# Altium PCB ESP32_breakout.PcbDoc
Units mil, origin at the board's own origin, x right, y up, seen from the top; angles counter-clockwise.
Board outline 2500 x 1250 mil, 4 copper layers (Top Layer, Layer 2, GND, Bottom Layer), stack 23.756 mil thick; 31 components, 42 nets, 192 pads, 125 vias.
Unrouted connection lines stored in the file: 8.
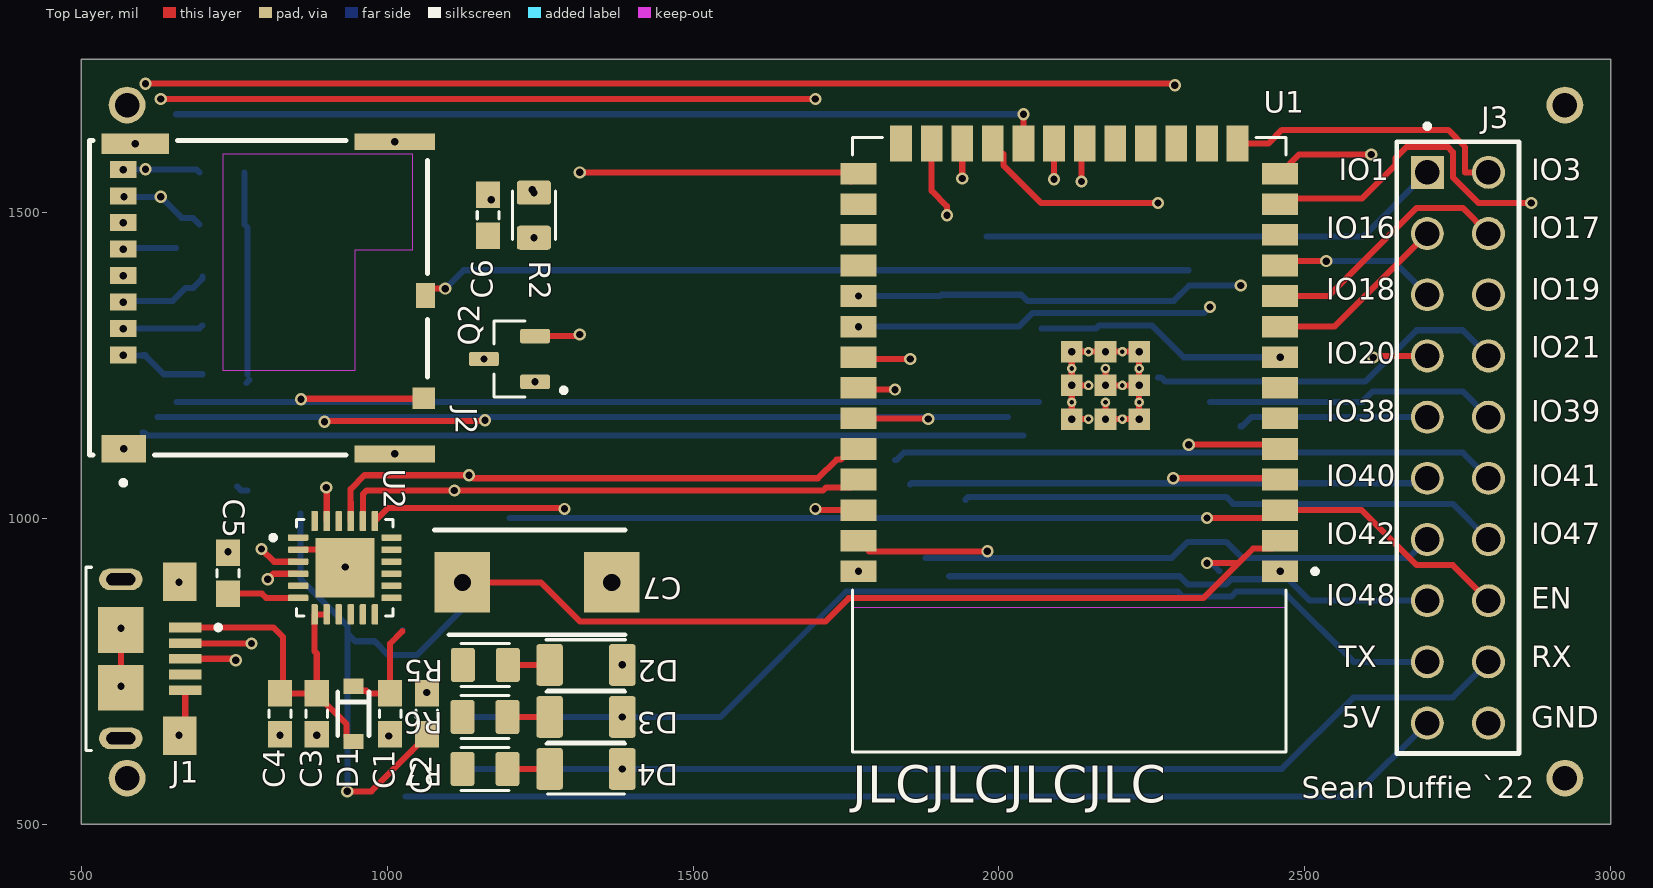
[diagram p0: Top Layer view]
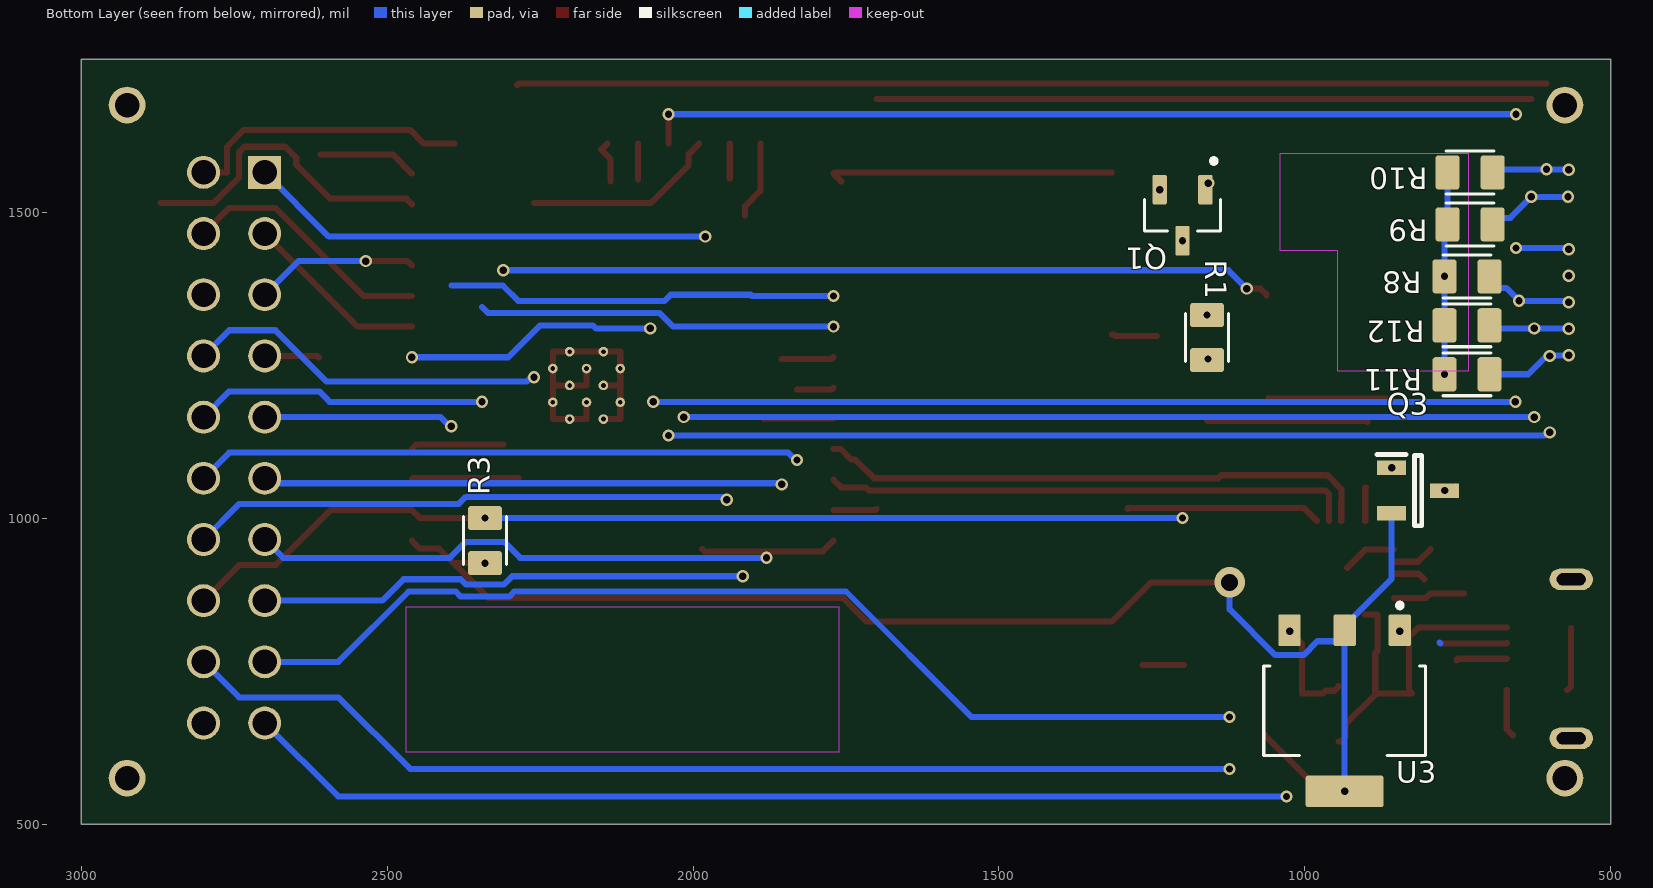
[diagram p1: Bottom Layer view, seen from below]
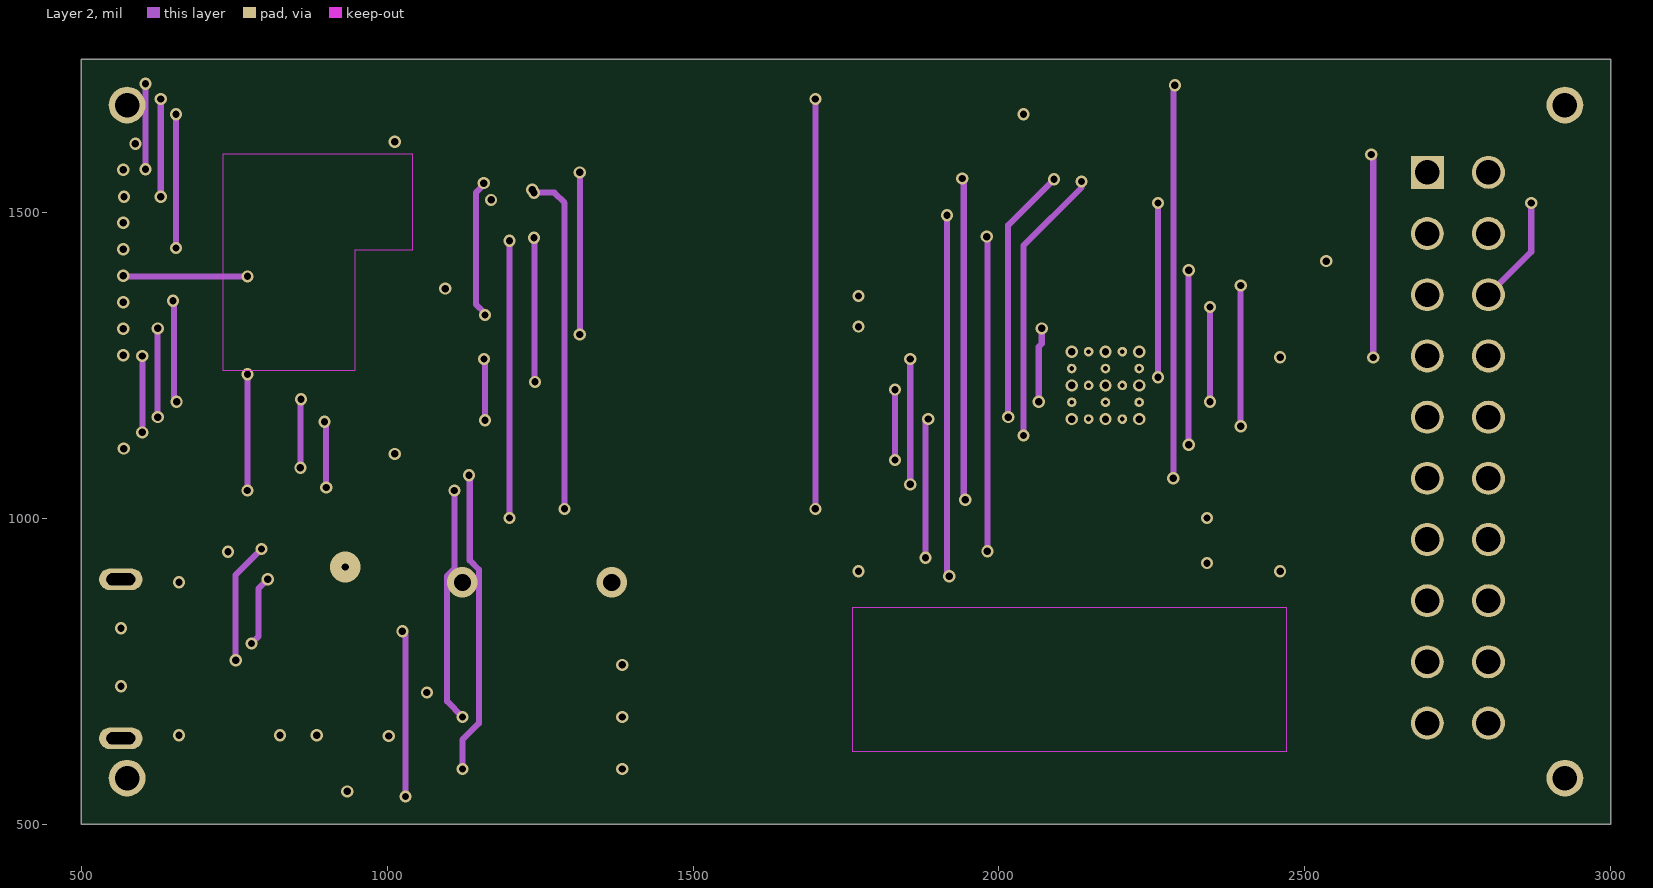
[diagram p2: Layer 2]
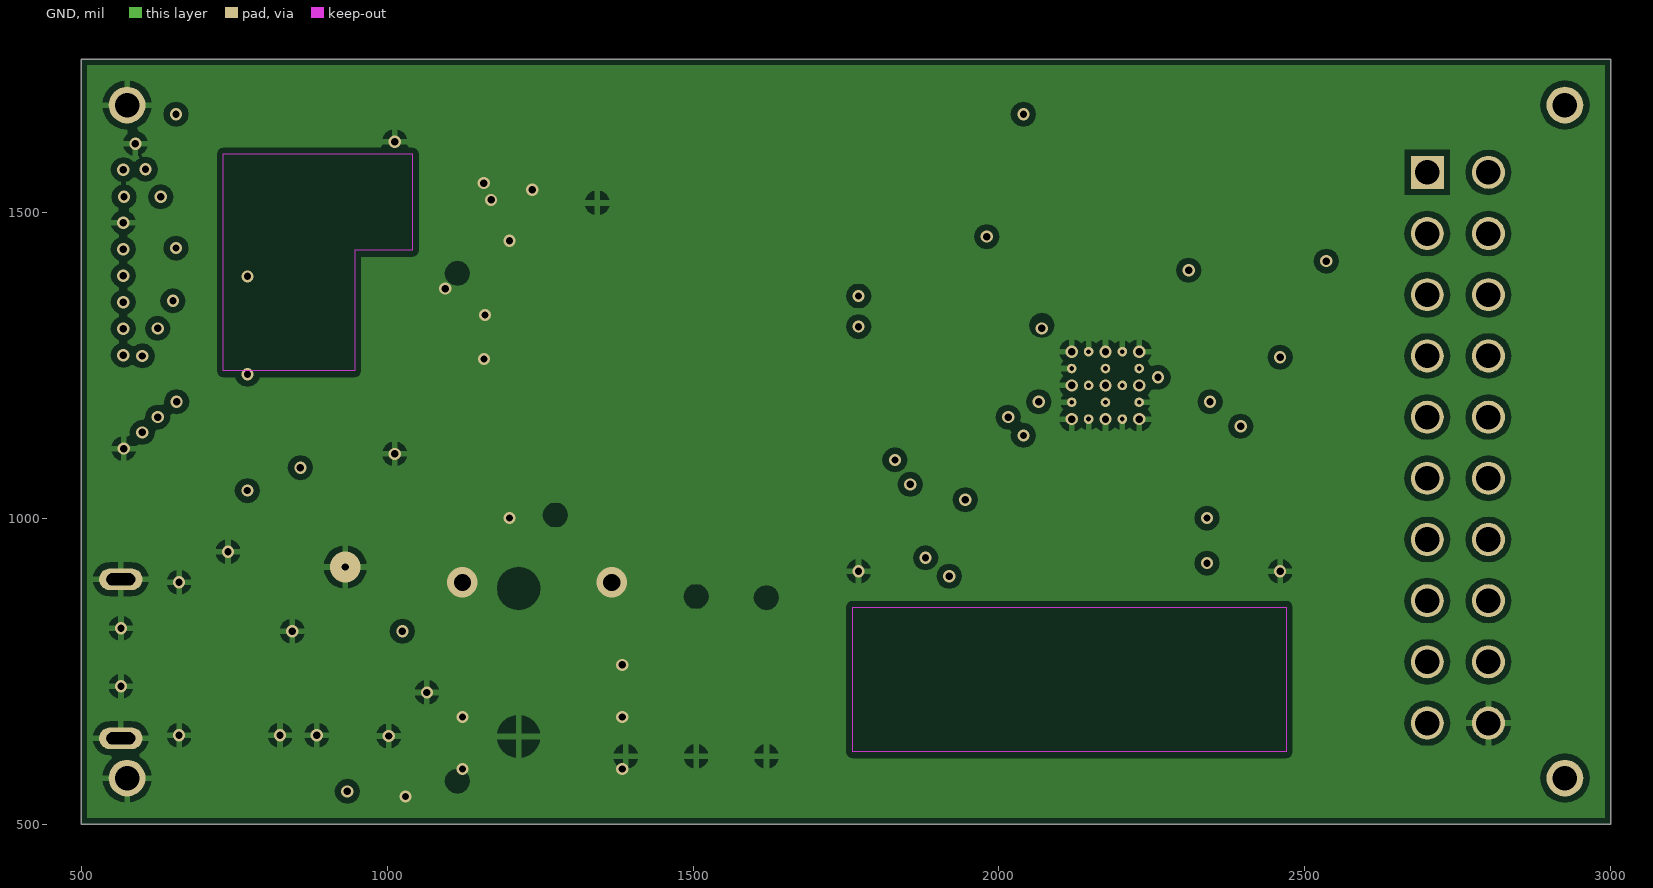
[diagram p3: GND]
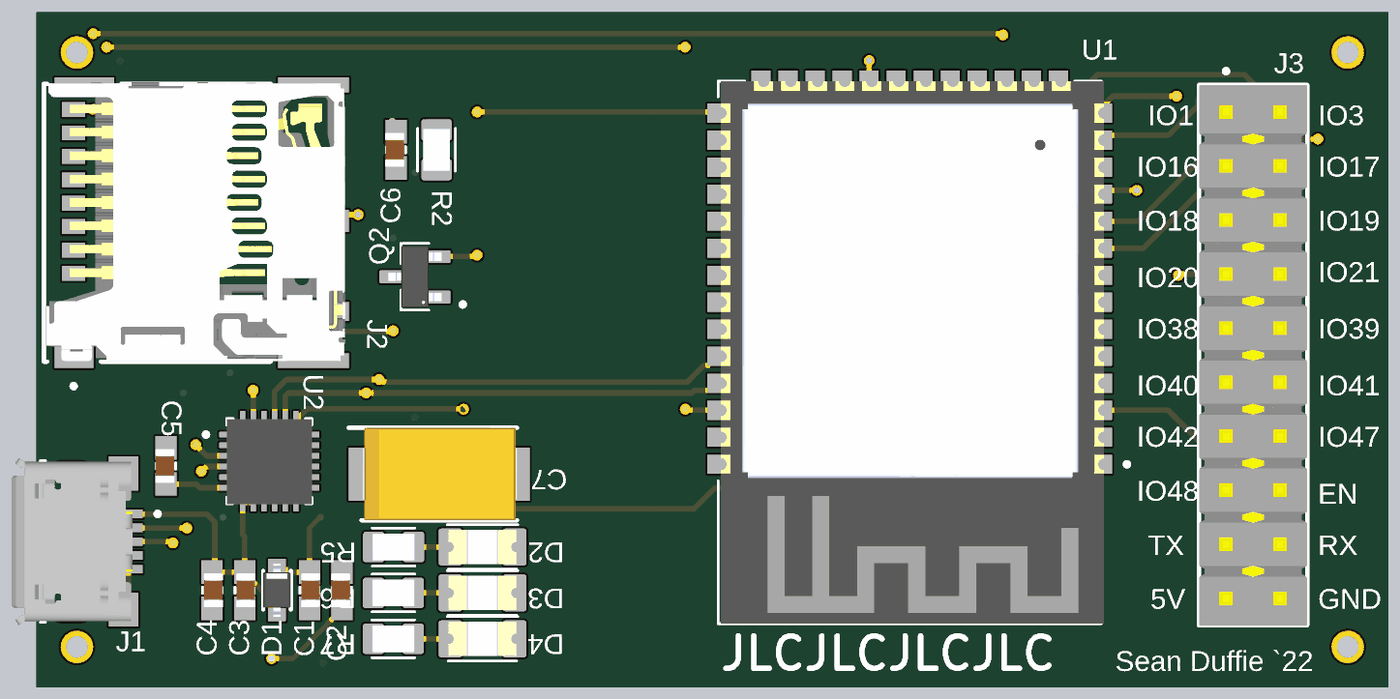
[diagram p4: 3D render of the assembled board from above, using the file's embedded part models]
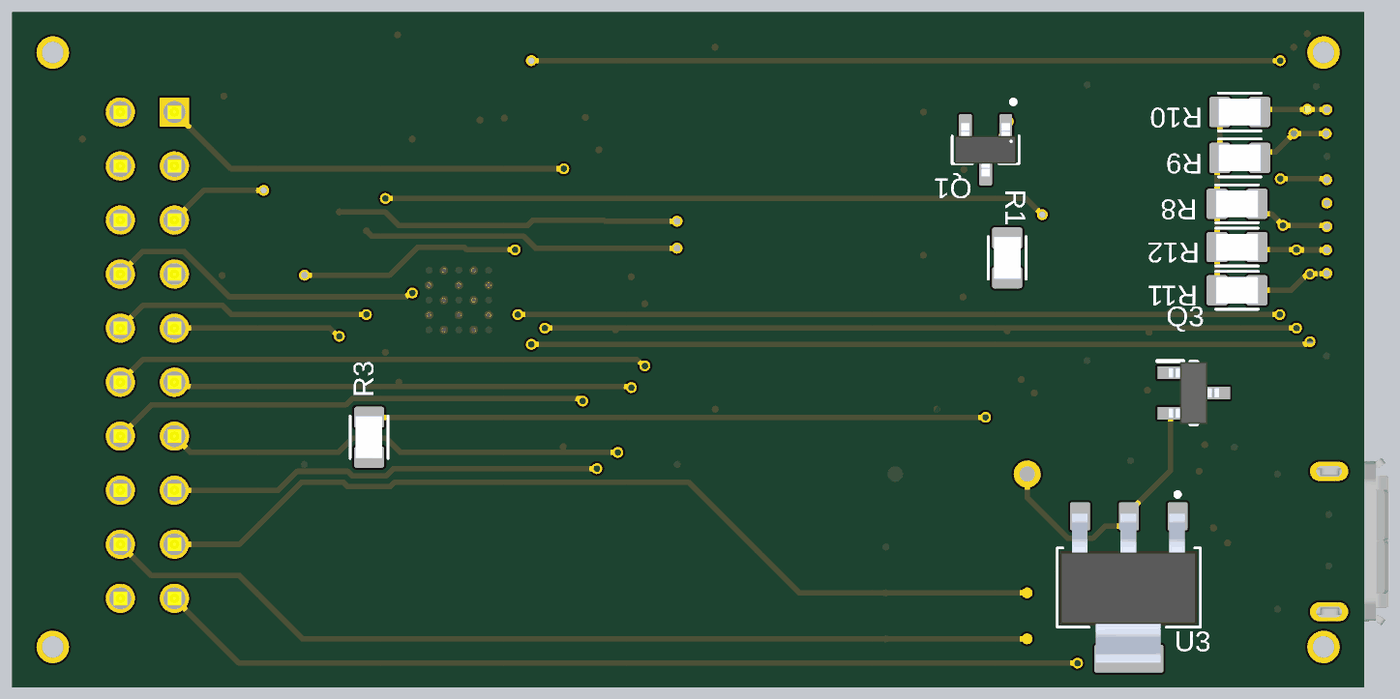
[diagram p5: 3D render of the assembled board from below, using the file's embedded part models]

## Layer stack, top to bottom
Top Solder: solder mask 0.4, Solder Resist, Dk 3.5
Top Layer: signal copper 1.4
Dielectric 2: prepreg 2.8, PP-006, Dk 4.1
Layer 2: signal copper 1.378
Dielectric 1: dielectric 12.6, FR-4, Dk 4.8
GND: signal copper 1.378
Dielectric 3: prepreg 2.8, PP-006, Dk 4.1
Bottom Layer: signal copper 1.4
Bottom Solder: solder mask 0.4, Solder Resist, Dk 3.5

## Board outline
500,500 500,1750 3000,1750 3000,500

## Design rules (kind name [scope] priority, off if disabled: settings)
Clearance [All] p1: gap=10 ignorepadtopadclearanceinfootprint=FALSE except(0: Arc-Hole Track-Hole SMDPad-Hole THPad-Hole Via-Hole Fill-Hole Poly-Hole Region-Hole Text-Hole)
PolygonConnect [All] p1: connectstyle=Relief reliefconductorwidth=10 reliefentries=4 polygonreliefangle="90 Angle" airgapwidth=10
RoutingVias [All] p1: holewidth=12 width=20 viastyle="Through Hole" minholewidth=12 minwidth=16 maxholewidth=28 maxwidth=50
SolderMaskExpansion [All] p1: expansion=4 istentingtop=FALSE
Width [All] p1: maxlimit=10 minlimit=10 preferedwidth=10
30 further rules are at their usual default settings.

## Components (designator, comment, footprint, x,y, rotation, side; value= is the part's Value field where it differs from the comment)
C1 "10 uF" CAPC1608X90 1005,680 r270 top
C2 "10 uF" CAPC1608X90 1065,680 r90 top
C3 "10 uF" CAPC1608X90 885,680 r270 top
C4 "100 nF" CAPC1608X90 825,680 r270 top
C5 "100 nF" CAPC1608X90 740,910 r90 top
C6 "1 uF" CAPC1608X90 1165,1495 r90 top
C7 "TAJD226K025RNJ" CAPPM7344X310N 1245,895 r0 top
D1 "" SOD-323 945,680 r270 top
D2 "RED" LEDC3216X110 1325,760 r180 top
D3 "RED" LEDC3216X110 1325,675 r180 top
D4 "RED" LEDC3216X110 1325,590 r180 top
J1 "micro-usb" AMPHENOL_10118193-0001LF 564.68,770 r270 top
J2 "MEM2080-00-128-00-A_REVA" GCT_MEM2080-00-128-00-A_REVA 790,1360 r90 top
J3 "TSW-110-26-S-D" SAMTEC_TSW-110-26-S-D 2700,1565 r270 top
Q1 "SS8050-G" SOT95P240X111-3N 1200,1495 r270 bottom
Q2 "SS8050-G" SOT95P240X111-3N 1200,1260 r180 top
Q3 "FDN340P" SOT95P237X112-3N 815,1045 r180 bottom
R1 "10k Ohm" RESC2012X65N 1160,1295 r90 bottom
R2 "10k Ohm" RESC2012X65N 1240,1495 r270 top
R3 "10k Ohm" RESC2012X65N 2340,963.19 r90 bottom
R5 "1k Ohms" RESC2012X65N 1160.55,760 r180 top
R6 "1k Ohms" RESC2012X65N 1160,675 r180 top
R7 "1k Ohms" RESC2012X65N 1160,590 r180 top
R8 "47k Ohm" RESC2012X65N 735,1395 r180 bottom
R9 "47k Ohm" RESC2012X65N 730,1480 r180 bottom
R10 "47k Ohm" RESC2012X65N 730,1565 r180 bottom
R11 "47k Ohm" RESC2012X65N 735,1235 r180 bottom
R12 "47k Ohm" RESC2012X65N 735,1315 r180 bottom
U1 "ESP32-S3-WROOM-1-N16R2" XCVR_ESP32-S3-WROOM-1-N16R2 2115,1120 r180 top
U2 "CP2102" QFN50P400X400X80-25N 930.79,918.82 r0 top
U3 "AMS1117-3V3" SOT229P700X180-4N 935,685 r0 bottom

## Footprints (in the part's own frame and the unit in brackets; to place one, negate y for a bottom-side part, rotate by r counter-clockwise, add the part's x,y. Pads: shape width x height; smd on the part's side, far side on the other; paste and mask are expansions set on the pad)
AMPHENOL_10118193-0001LF [mm]
  rect 0.4x1.35 smd: 1(-1.3,2.675) 2(-0.65,2.675) 3(0,2.675) 4(0.65,2.675) 5(1.3,2.675)
  rect 1.6x1.4 smd: S1(-3.2,2.45) S2(3.2,2.45)
  rect 1.9x1.9 smd: S3(1.2,0) S4(-1.2,0)
  oval 0.9x1.8 hole 0.5 slot 1.2 at 90 deg: S5(-3.3,0) S6(3.3,0)
  silkscreen extent -3.8,-1.45 3.8,4.15, body extent -3.93,-2.79 3.93,2.87, height 3.18
CAPC1608X90 [mm]
  rect 1.1x1 smd: 1(-0.85,0) 2(0.85,0)
  silkscreen extent -0.15,-0.45 0.15,0.45, body extent -0.8,-0.39 0.8,0.51, height 0.81
CAPPM7344X310N [mm]
  rect 2.3x2.5 smd: 1(-3.1,0) 2(3.1,0)
  silkscreen extent -4.25,-2.17 3.65,2.17, body extent -3.62,-2.17 3.68,2.17, height 3.1
GCT_MEM2080-00-128-00-A_REVA [mm]
  rect 0.9x0.93 smd: DSW1(-4.17,-6.85)
  rect 1.05x0.78 smd: DSW2(0.095,-6.925)
  rect 0.7x1.1 smd: P1(-2.38,5.615) P2(-1.28,5.615) P3(-0.18,5.615) P4(0.92,5.615) P5(2.02,5.615) P6(3.12,5.615) P7(4.22,5.615) P8(5.32,5.615)
  rect 1.14x1.83 smd: S1(-6.26,5.6)
  rect 0.86x2.8 smd: S2(6.4,5.115)
  rect 0.7x3.33 smd: S3(-6.48,-5.65) S4(6.48,-5.65)
  Keep-Out Layer region: 5.97,-6.385 1.97,-6.385 1.97,-3.985 -3.03,-3.985 -3.03,1.465 5.97,1.465
  silkscreen extent -7.78,-7.02 6.53,7.02, body extent -6.5,-7.15 6.6,6.9, height 1.28
LEDC3216X110 [mm]
  rrect20% 1.1x1.73 smd: A(1.51,0) C(-1.51,0)
  silkscreen extent -1.65,-1.05 1.65,1.05, body extent -1.6,-0.8 1.6,0.8, height 1.1
QFN50P400X400X80-25N [mm]
  rrect25% 0.84x0.26 smd: 1(-1.935,1.25) 2(-1.935,0.75) 3(-1.935,0.25) 4(-1.935,-0.25) 5(-1.935,-0.75) 6(-1.935,-1.25) 13(1.935,-1.25) 14(1.935,-0.75) 15(1.935,-0.25) 16(1.935,0.25) 17(1.935,0.75) 18(1.935,1.25)
  rrect25% 0.26x0.84 smd: 7(-1.25,-1.935) 8(-0.75,-1.935) 9(-0.25,-1.935) 10(0.25,-1.935) 11(0.75,-1.935) 12(1.25,-1.935) 19(1.25,1.935) 20(0.75,1.935) 21(0.25,1.935) 22(-0.25,1.935) 23(-0.75,1.935) 24(-1.25,1.935)
  rect 2.45x2.45 smd paste-0.455: 25(0,0)
  silkscreen extent -3.07,-2 2,2, body extent -2,-2.03 2,1.97, height 0.8
RESC2012X65N [mm]
  rrect25% 1x1.42 smd: 1(-0.935,0) 2(0.935,0)
  silkscreen extent -1,-0.89 1,0.89, body extent -1,-0.63 1,0.63, height 0.6
SAMTEC_TSW-110-26-S-D [mm]
  rect 1.37x1.37 hole 1.02: 01(0,0)
  round 1.37 hole 1.02: 02(0,2.54) 03(2.54,0) 04(2.54,2.54) 05(5.08,0) 06(5.08,2.54) 07(7.62,0) 08(7.62,2.54) 09(10.16,0) 10(10.16,2.54) 11(12.7,0) 12(12.7,2.54) 13(15.24,0) 14(15.24,2.54) 15(17.78,0) 16(17.78,2.54) 17(20.32,0) 18(20.32,2.54) 19(22.86,0) 20(22.86,2.54)
  silkscreen extent -2.02,-1.27 24.13,3.81, body extent -1.27,-1.27 24.13,3.81, height 8.38
SOD-323 [mm]
  rect 0.63x0.83 smd: A(1.15,0) C(-1.15,0)
  silkscreen extent -0.9,-0.65 0.9,0.65, body extent -1.25,-0.64 1.25,0.64, height 1.17
SOT95P237X112-3N [mm] "P-channel MOSFET"
  rect 1.2x0.6 smd: 1(-1.1,0.95) 2(-1.1,-0.95) 3(1.1,0)
  silkscreen extent -1.7,-1.46 0.15,1.5, body extent -1.18,-1.46 1.19,1.46, height 1.12
SOT95P240X111-3N [mm]
  rrect25% 1.23x0.6 smd: 1(-1.06,0.95) 2(-1.06,-0.95) 3(1.06,0)
  silkscreen extent -2.35,-1.57 0.65,1.57, body extent -1.25,-1.45 1.25,1.45, height 1.1
SOT229P700X180-4N [mm]
  rrect15% 0.93x1.31 smd: 1(-2.29,-3.345) 2(0,-3.345) 3(2.29,-3.345)
  rrect15% 3.24x1.31 smd: 4(0,3.345)
  silkscreen extent -3.36,-4.47 3.36,1.86, body extent -3.22,-3.47 3.28,3.53, height 1.73
XCVR_ESP32-S3-WROOM-1-N16R2 [mm]
  rect 1.5x0.9 smd: 1(-8.75,5.26) 2(-8.75,3.99) 3(-8.75,2.72) 4(-8.75,1.45) 5(-8.75,0.18) 6(-8.75,-1.09) 7(-8.75,-2.36) 8(-8.75,-3.63) 9(-8.75,-4.9) 10(-8.75,-6.17) 11(-8.75,-7.44) 12(-8.75,-8.71) 13(-8.75,-9.98) 14(-8.75,-11.25) 27(8.75,-11.25) 28(8.75,-9.98) 29(8.75,-8.71) 30(8.75,-7.44) 31(8.75,-6.17) 32(8.75,-4.9) 33(8.75,-3.63) 34(8.75,-2.36) 35(8.75,-1.09) 36(8.75,0.18) 37(8.75,1.45) 38(8.75,2.72) 39(8.75,3.99) 40(8.75,5.26)
  rect 0.9x1.5 smd: 15(-6.985,-12.5) 16(-5.715,-12.5) 17(-4.445,-12.5) 18(-3.175,-12.5) 19(-1.905,-12.5) 20(-0.635,-12.5) 21(0.635,-12.5) 22(1.905,-12.5) 23(3.175,-12.5) 24(4.445,-12.5) 25(5.715,-12.5) 26(6.985,-12.5)
  rect 0.9x0.9 smd: 41_1(-1.5,-2.46) 41_2(-2.9,-2.46) 41_3(-0.1,-2.46) 41_4(-2.9,-3.86) 41_5(-1.5,-3.86) 41_6(-0.1,-3.86) 41_7(-2.9,-1.06) 41_8(-1.5,-1.06) 41_9(-0.1,-1.06)
  round 0.4 hole 0.2 mask+0: 41_10(-1.5,-1.76) 41_11(-2.9,-1.76) 41_12(-0.1,-1.76) 41_13(-2.9,-3.16) 41_14(-1.5,-3.16) 41_15(-0.1,-3.16) 41_16(-2.2,-1.06) 41_17(-0.8,-1.06) 41_18(-2.2,-2.46) 41_19(-0.8,-2.46) 41_20(-2.2,-3.86) 41_21(-0.8,-3.86)
  Keep-Out Layer region: 9,6.75 -9,6.75 -9,12.75 9,12.75
  Keep-Out Layer region: 9,6.75 -9,6.75 -9,12.75 9,12.75
  silkscreen extent -10.3,-12.75 9,12.75, body extent -9.13,-12.75 8.87,12.75, height 3.25

## Part data
C1 C2 C3 C4 C5 C6: library part LD03ZD475MAB2A, "COMMERCIAL CHIP STD JAPAN BULK - FN TAPE/REEL, 7 INCH PAPER TAPE", Package=None, Availability=Unavailable, MP=LD03ZD475MAB2A, Price=None
C7: "TAJ SMT tant capacitor,Case D,25V,22uF AVX +/-10% 22uF 25 V dc SMD Tantalum Electrolytic Capacitor, 7343-31 ESR 900m +125C TAJ", Manufacturer_Name=AVX, Mouser Part Number=581-TAJD226K025R, Datasheet Link=http://datasheets.avx.com/TAJ.pdf, Geometry.Height=3.1mm, Manufacturer_Part_Number=TAJD226K025RNJ, Mouser Price/Stock=https://www.mouser.co.uk/ProductDetail/AVX/TAJD226K025RNJ?qs=min0%252Bk%2FlUAa%252BdXCotYsVZg%3D%3D
D1: library part BAT20JFILM, "Diode Schottky 23V 1A Surface Mount SOD-323", Package="SOD-323 STMicroelectronics", Availability=Unavailable, MF=STMicroelectronics, MP=BAT20JFILM, Price=None, SnapEDA_Link=https://www.snapeda.com/parts/BAT20JFILM/STMicroelectronics/view-part/110314/?ref=snap
D2 D3 D4: library part LTST-C230KFKT, "Orange 605nm LED Indication - Discrete 2V 1206 (3216 Metric)", Package="1206 Lite-On", Availability="In Stock", Check_prices=https://www.snapeda.com/parts/LTST-C230KFKT/Lite-On+Inc./view-part/?ref=eda, MF="Lite-On Inc.", MP=LTST-C230KFKT, Price=None, Purchase-URL=https://pricing.snapeda.com/search?q=LTST-C230KFKT&ref=eda, SnapEDA_Link=https://www.snapeda.com/parts/LTST-C230KFKT/Lite-On+Inc./view-part/?ref=snap
J1: library part 10118193-0001LF, "Micro USB 2.0, Input Output Connectors, B TYPE RECEPTACLE", Package=None, Availability="In Stock", Check_prices=https://www.snapeda.com/parts/10118193-0001LF/Amphenol+FCI/view-part/?ref=eda, MF="Amphenol ICC", MP=10118193-0001LF, Price=None, Purchase-URL=https://pricing.snapeda.com/search/part/10118193-0001LF/?ref=eda, SnapEDA_Link=https://www.snapeda.com/parts/10118193-0001LF/Amphenol+FCI/view-part/?ref=snap
J2: "9 (8 + 1) Position Card Connector Secure Digital - microSDâ„¢ Surface Mount, Right Angle Gold", Package=None, Availability="In Stock", Check_prices=https://www.snapeda.com/parts/MEM2080-00-128-00-A/Global+Connector+Technology/view-part/?ref=eda, MF="Global Connector Technology", MP=MEM2080-00-128-00-A, Price=None, Purchase-URL=https://pricing.snapeda.com/search/part/MEM2080-00-128-00-A/?ref=eda, SnapEDA_Link=https://www.snapeda.com/parts/MEM2080-00-128-00-A/Global+Connector+Technology/view-part/?ref=snap
J3: Package=None, Availability=Unavailable, MP=TSW-110-26-S-D, Price=None
Q1 Q2: "Bipolar (BJT) Transistor NPN 25 V 1.5 A 100MHz 300 mW Surface Mount SOT-23-3", Package=None, Check_prices=https://www.snapeda.com/parts/SS8050G/Comchip/view-part/?ref=eda, Digi-Key_Part_Number=641-1790-2-ND, MF=Comchip, MP=SS8050G, SnapEDA_Link=https://www.snapeda.com/parts/SS8050G/Comchip/view-part/?ref=snap
Q3: "Trans MOSFET P-CH 20V 2A 3-Pin SuperSOT", Manufacturer_Name=onsemi, Mouser Part Number=512-FDN340P, Datasheet Link=https://www.onsemi.com/pub/Collateral/FDN340P-D.PDF, Geometry.Height=1.12mm, Manufacturer_Part_Number=FDN340P, Mouser Price/Stock=https://www.mouser.co.uk/ProductDetail/onsemi-Fairchild/FDN340P?qs=AMp2PTjoga9dhzFXRaqTZw%3D%3D
R1 R2 R3 R5 R6 R7 R8 R9 R10 R11 R12: library part 1676221-2, "RES SMD 1K OHM 0.1% 1/10W 0805", Package=0805, Power_Rating=".1 W", Resistance=1K, Tolerance=.1%, Voltage_Rating="100 V", Availability="In Stock", Check_prices=https://www.snapeda.com/parts/1676221-2/TE+Connectivity/view-part/?ref=eda, EU_RoHS_Compliance=Compliant, MF="TE Connectivity", MP=1676221-2, Price=None, SnapEDA_Link=https://www.snapeda.com/parts/1676221-2/TE+Connectivity/view-part/?ref=snap
U1: "Bluetooth, WiFi 802.11b/g/n, Bluetooth v5.0 Transceiver Module 2.4GHz PCB Trace Surface Mount", Package=None, Availability="In Stock", Check_prices=https://www.snapeda.com/parts/ESP32-S3-WROOM-1-N16R2/Espressif+Systems/view-part/?ref=eda, MF="Espressif Systems", MP=ESP32-S3-WROOM-1-N16R2, Price=None, Purchase-URL=https://pricing.snapeda.com/search/part/ESP32-S3-WROOM-1-N16R2/?ref=eda, SnapEDA_Link=https://www.snapeda.com/parts/ESP32-S3-WROOM-1-N16R2/Espressif+Systems/view-part/?ref=snap
U2: library part CP2102N-A02-GQFN24R, Package=None, Availability=Unavailable, MP=CP2102N-A02-GQFN24R, Price=None
U3: library part AMS1117-3.3, "Sot223/Pkg 1-Amp 3.3-Volt Low Drop Out Voltage Regulatator", Package=None, Availability=Unavailable, MF="Advanced Monolithic Systems", MP=AMS1117-3.3, Price=None, SnapEDA_Link=https://www.snapeda.com/parts/AMS1117-3.3/Advanced%20Monolithic%20Systems/view-part/53450/?ref=snap

## Free pads (board coordinates)
  round 60 hole 40: 15(575,575) 15(575,1675) 15(2925,575) 15(2925,1675)

## Via types
v1: diameter 20, hole 12, Top Layer to Layer 2, 38 vias
v2: diameter 20, hole 12, Layer 2 to Bottom Layer, 34 vias
v3: diameter 20, hole 12, Top Layer to GND, 29 vias
v4: diameter 20, hole 12, Top Layer to Bottom Layer, 20 vias
v5: diameter 50, hole 28, Top Layer to Bottom Layer, 1 vias
v6: diameter 20, hole 12, GND to Bottom Layer, 1 vias
v7: diameter 50, hole 28, Top Layer to GND, 1 vias
v8: diameter 50, hole 12, Top Layer to GND, 1 vias

## Nets (pads, with @x,y where several pads share a name; then routed paths per layer and width w, separated by ;. In a path a pad name is that pad's centre, name@x,y a point inside that pad or via, vN(x,y) a via of type N, cw(c..) or ccw(c..) an arc to the next point about the centre after c; other vN are vias at no path point)
3V3: C2.1 C7.1 Q3.2 R3.1 R5.2 U1.2 U3.2 U3.4 | length 2424.6
  Top Layer w10: v4(935,553.31) 974.32,553.31 1039.69,618.67 1039.69,619.25 1065,644.57 C2.1 ; v5(1122.95,895) 1251.35,895 1315.56,830.79 1715.99,830.79 1754.46,869.25 2334.25,869.25 2391.38,926.38 ; v4(2340,926.38) 2391.38,926.38 ; U1.2 2446.77,950.2 2415.2,950.2 2391.38,926.38
  Bottom Layer w10: Q3.2 858.31,900.87 935,824.17 U3.2 U3.2@935,811.96 ; v4(935,553.31) U3.2@935,811.96 ; v5(1122.95,895) 1122.95,850.79 1048.07,775.9 1002.25,775.9 979.5,798.65 948.31,798.65 U3.2@935,811.96 ; R3.1@2345,928.19 2345.31,928.19 R3.1@2360,913.5
5V: C1.1 D1.C J3.19 U3.3 | length 2168.2
  Top Layer w10: D1.C 952.4,717.87 965.9,717.87 970.31,713.46 C1.1 1005,795 v2(1025,815)
  Layer 2 w10: v2(1025,815) 1030,810 v2(1030,545)
  Bottom Layer w10: v2(1025,815) 1025,816.53 U3.3 ; v2(1030,545) 2580,545 J3.19
5V-USB: C3.1 C4.1 D1.A J1.1 U2.7 U2.8 | length 576.7
  Top Layer w10: J1.1 814.17,821.18 830,805.36 830,718.46 C4.1 C3.1 ; U2.8 U2.7 881.58,782.32 885,778.9 C3.1 ; D1.A 941.06,634.72 933.66,642.13 933.66,662.83 885,711.5 C3.1
DTR: Q2.3 R1.1 U2.23 | length 528
  Top Layer w10: v1(897.66,1157.34) 898.99,1158.67 1158.67,1158.67 v1(1160,1160) ; v1(900.63,1050) 901.26,1049.37 U2.23
  Layer 2 w10: v1(897.66,1157.34) 900.32,1154.68 900.32,1050.32 v1(900.63,1050) ; v4(1158.27,1260) 1160,1258.27 v1(1160,1160)
  other v1: 1158.27,1260
EN: C6.1 J3.16 Q1.3 R3.2 U1.3 | length 2119.9
  Top Layer w10: v4(2340,1000) 2340.2,1000.2 2446.77,1000.2 U1.3 2592.74,1012.91 2682.62,923.03 2741.97,923.03 J3.16
  Layer 2 w10: v2(1200,1000) v2(1200,1453.27)
  Bottom Layer w10: v2(1200,1000) v4(2340,1000)
ESP-RX: J3.18 R7.2 U1.36 U2.21 | length 3160.9
  Top Layer w10: 940.32,1026.54 940.32,1047.43 962.89,1070 1136.67,1070 1141.67,1065 1704.14,1065 1734.77,1095.63 1741.42,1095.63 1758.7,1112.91 U1.36 ; U2.21 940.63,1026.54
  Layer 2 w10: v2(1123.19,590) 1123.19,637.83 1150,664.64 1150,915.97 1135,930.97 1135,1068.96 v1(1133.96,1070)
  Bottom Layer w10: v2(1123.19,590) 2462.51,590 2579.48,706.97 2741.97,706.97 J3.18
ESP-TX: J3.17 R6.2 U1.37 U2.20 | length 2968.7
  Top Layer w10: U2.20 960.32,1039.14 966.17,1045 1712.43,1045 1717.62,1050.2 1757.79,1050.2 U1.37
  Layer 2 w10: v1@1110,1047.81 1110,917.4 1097.95,905.36 1097.95,700.24 v2(1123.19,675)
  Bottom Layer w10: v2(1123.19,675) 1545,675 1750,880 2292.13,880 2300.43,871.69 2379.57,871.69 2387.87,880 2464.8,880 2579.8,765 J3.17
  other v1: 1110,1045
GND: C1.2 C2.2 C3.2 C4.2 C5.2 C6.2 C7.2 D2.C D3.C D4.C J1.5 J1.S1 J1.S2 J1.S3 J1.S4 J1.S5 J1.S6 J2.P6 J2.S1 J2.S2 J2.S3 J2.S4 J3.20 pad.15@575,575 pad.15@575,1675 U1.1 U1.40 U1.41_1 U1.41_2 U1.41_3 U1.41_4 U1.41_5 U1.41_6 U1.41_7 U1.41_8 U1.41_9 U1.41_10 U1.41_11 U1.41_12 U1.41_13 U1.41_14 U1.41_15 U1.41_16 U1.41_17 U1.41_18 U1.41_19 U1.41_20 U1.41_21 U2.2 U2.25 U3.1 | length 823.3
  Top Layer w10: v3(565,820) v3(565,725) J1.S3@571.18,718.82 ; v3(660,645) 670,655 J1.5 ; U2.2 901.26,948.35 U2.25 ; U1.41_17 v3(2118.94,1161.73) U1.41_12 v3(2118.94,1216.85) ; U1.41_19 v3(2118.94,1216.85) ; U1.41_10 v3(2174.05,1161.73) U1.41_16 v3(2229.17,1161.73) U1.41_11 v3(2229.17,1216.85) U1.41_2@2224.38,1216.85 ; U1.41_14 v3(2174.05,1216.85) U1.41_18 U1.41_2@2224.38,1216.85 ; v3(2118.94,1216.85) U1.41_15 v3(2118.94,1271.97) U1.41_21 v3(2174.05,1271.97) U1.41_20 v3(2229.17,1271.97) U1.41_13 2229.17,1221.64 U1.41_2@2224.38,1216.85
  other v3: 1384.45,590 1002.64,643.82 825,645 885,645 1384.45,675 1065,715 1384.45,760 660,895 1770.51,912.91 2459.49,912.91 740,945 1012.44,1104.88 569.53,1113.54 568.94,1482.83 1170,1520 588.62,1611.97 1012.44,1615.12
  other v6: 845,815
  other v7: 1367.05,895
  other v8: 931.58,920
IO0: Q2.2 U1.27 | length 813.7
  Top Layer w10: Q2.2 1309.7,1297.4 1312.29,1300 v1(1315,1300) ; v1(1315,1565) 1768.42,1565 U1.27 U1.27@1757.79,1550.2
  Layer 2 w10: v1(1315,1300) v1(1315,1565)
IO1: J3.01 U1.39 | length 1501.5
  Top Layer w10: U1.39 1787.79,945.63 v1(1981.1,945.63) v1@1984.91,949.44
  Layer 2 w10: v2(1980,1460) 1981.1,1458.9 v1(1981.1,945.63)
  Bottom Layer w10: v2(1980,1460) 2595,1460 J3.01
IO3: J3.02 U1.15 | length 472.2
  Top Layer w10: U1.15 2440.25,1612.13 2462.4,1634.28 2734.15,1634.28 2761.97,1606.47 2761.97,1565 J3.02
IO16: J3.03 U1.9 | length 303.5
  Top Layer w10: U1.9 2547.91,1312.91 J3.03
IO17: J3.04 U1.10 | length 417.6
  Top Layer w10: U1.10 2538.56,1362.91 2682.62,1506.97 2758.03,1506.97 J3.04
IO18: J3.05 U1.11 | length 266.2
  Top Layer w10: U1.11 2466.58,1420 v4(2535,1420)
  Bottom Layer w10: v4(2535,1420) 2645,1420 J3.05
IO19: J3.06 U1.13 | length 697.3
  Top Layer w10: U1.13 2468.78,1522.2 2593.06,1522.2 2648.57,1577.71 2648.57,1588.72 2666.82,1606.97 2733.18,1606.97 2741.97,1598.18 2741.97,1556.72 2783.68,1515 v1(2870,1515)
  Layer 2 w10: J3.06 2870,1435 v1(2870,1515)
IO20: J3.07 U1.14 | length 584.5
  Top Layer w10: U1.14 2490.86,1594.28 v1(2608.57,1594.28) ; v1(2611.82,1262.47) 2614.35,1265 J3.07
  Layer 2 w10: v1(2608.57,1594.28) 2611.82,1591.03 v1(2611.82,1262.47)
IO21: J3.08 U1.23 | length 1201.1
  Top Layer w10: U1.23 2007.28,1594.84 2007.28,1576.39 2068.67,1515 v1(2260,1515)
  Layer 2 w10: v2(2260,1230) v1(2260,1515)
  Bottom Layer w10: v2(2260,1230) 2265,1230 2271.97,1223.03 2598.68,1223.03 2682.62,1306.97 2758.03,1306.97 J3.08
IO38: J3.09 U1.31 | length 1181.1
  Layer 2 w10: v2(2395,1150) v1(2395,1380)
  Bottom Layer w10: v4(1770.51,1362.91) 1903.75,1362.91 1905.83,1365 2036.36,1365 2046.36,1355 2285.58,1355 2310.58,1380 v1(2395,1380) ; v2(2395,1150) 2397.71,1150 2412.71,1165 J3.09
IO39: J3.10 U1.32 | length 1222.2
  Layer 2 w10: v2(2345,1190) v1(2345,1345)
  Bottom Layer w10: v4(1770.51,1312.91) 2032.56,1312.91 2054.64,1335 2335,1335 v1(2345,1345) ; v2(2345,1190) 2593.93,1190 2610.9,1206.97 2758.03,1206.97 J3.10
IO40: J3.11 U1.33 | length 1139.8
  Top Layer w10: U1.33 1773.42,1260 v1(1855,1260)
  Layer 2 w10: v2(1855,1055) v1(1855,1260)
  Bottom Layer w10: v2(1855,1055) 1856.91,1056.91 2691.91,1056.91 J3.11
IO41: J3.12 U1.34 | length 1168
  Top Layer w10: U1.34 1773.42,1210 v1(1830,1210)
  Layer 2 w10: v2(1830,1095) v1(1830,1210)
  Bottom Layer w10: v2(1830,1095) 1832.71,1095 1844.67,1106.97 2758.03,1106.97 J3.12
IO42: J3.13 U1.35 | length 1197
  Top Layer w10: U1.35 1883.41,1162.91 v1(1884.32,1162)
  Layer 2 w10: v2(1880,935) 1880,1157.68 v1(1884.32,1162)
  Bottom Layer w10: v2(1880,935) 2282.65,935 2308.72,961.06 2371.28,961.06 2397.35,935 2670,935 J3.13
IO47: J3.14 U1.24 | length 1470
  Top Layer w10: v1(1940,1555) U1.24
  Layer 2 w10: v1(1940,1555) 1942.5,1552.5 1942.5,1032.5 v2(1945,1030)
  Bottom Layer w10: v2(1945,1030) 1949.69,1034.69 2371.28,1034.69 2382.94,1023.03 2741.97,1023.03 J3.14
IO48: J3.15 U1.25 | length 1523.7
  Top Layer w10: U1.25 1890,1535 1915,1510 v1(1915,1495)
  Layer 2 w10: v1(1915,1495) 1915,911.4 1918.73,907.67 v2(1918.73,905)
  Bottom Layer w10: v2(1918.73,905) 2295.41,905 2300.41,900 2308.72,891.69 2371.28,891.69 2379.59,900 2473.08,900 2508.08,865 J3.15
NetC5_1: C5.1 U2.6 | length 117.5
  Top Layer w10: C5.1 795.47,876.53 802.4,869.61 U2.6
NetD2_A: D2.A R5.1 | length 68.2
  Top Layer w10: R5.1 D2.A
NetD3_A: D3.A R6.1 | length 68.7
  Top Layer w10: R6.1 D3.A
NetD4_A: D4.A R7.1 | length 68.7
  Top Layer w10: R7.1 D4.A
NetJ1_2: J1.2 U2.4 | length 280.3
  Top Layer w10: J1.2 670.59,795 v1(778.31,795) ; v1(805,900) 813.98,908.98 U2.4
  Layer 2 w10: v1(778.31,795) 790,806.69 790,885 v1(805,900)
  Bottom Layer w10: v1(778.31,795) 780,796.69
NetJ1_3: J1.3 U2.3 | length 351.3
  Top Layer w10: J1.3 750,770 v1(752.5,767.5) ; v1(794.69,949.34) 815.36,928.66 832.17,928.66 U2.3
  Layer 2 w10: v1(752.5,767.5) 752.5,907.15 v1(794.69,949.34)
NetJ2_DSW1: J2.DSW1 Q3.1 | length 313.3
  Top Layer w10: v1(859.15,1194.15) 860,1195 1058.86,1195 J2.DSW1
  Layer 2 w10: v2(858.31,1082.4) 858.31,1193.31 v1(859.15,1194.15)
NetJ2_P4: J2.P4 Q3.3 R8.1 R9.1 R10.1 R11.1 R12.1 | length 752
  Layer 2 w10: v4(568.94,1396.22) 570.16,1395 v2(771.81,1395) ; v2(771.69,1045) v2@771.69,1235
  Bottom Layer w10: Q3.3@755,1051.81 761.81,1045 v2(771.69,1045) ; R10.1 R9.1 771.81,1475 v2(771.81,1395) R12.1 v2(771.81,1235) ; R11.1@770,1220.71 R11.1@775,1225.71
NetQ1_1: Q1.1 R1.2 | length 227.2
  Layer 2 w10: v2(1157.86,1547.44) 1157.86,1544.73 1145,1531.87 1145,1349.52 1160,1334.52 v2(1160,1331.81)
NetQ2_1: Q2.1 R2.2 | length 236.3
  Layer 2 w10: v1(1240,1458.19) 1240.87,1457.32 1240.87,1223.46 v1(1241.73,1222.6)
RTS: Q1.2 R2.1 U2.19 | length 875.6
  Top Layer w10: U2.19@980.43,995.43 1001.16,1016.16 1288.84,1016.16 v1(1290,1015)
  Layer 2 w10: v1(1240,1531.81) 1273.19,1531.81 1290,1515 v1(1290,1015)
  other v4: 1237.4,1536.73
SD-CLK: J2.P5 U1.22 | length 1744.7
  Top Layer w10: U1.22 v4(2040,1660)
  Layer 2 w10: v2(655,1660) v2@655,1447.71 ; v2@655,1447.71 v2(655,1441.35) v2@655,1447.71
  Bottom Layer w10: v4(568.94,1439.53) 570.76,1441.35 v2(655,1441.35) ; v2(655,1660) v4(2040,1660)
SD-CMD: J2.P3 R8.2 U1.8 | length 2260.9
  Layer 2 w10: v2(650,1355) 651.91,1353.09 651.91,1194.04 v2(655.96,1190) ; v2(2065,1190) 2065,1280 2070,1285 v2(2070,1310)
  Bottom Layer w10: v4(568.94,1352.91) 570.85,1354.83 577.92,1354.83 578.1,1355 v2(650,1355) 671.11,1376.11 683.5,1376.11 698.19,1390.8 R8.2 ; v2(655.96,1190) v2(2065,1190) ; v2(2070,1310) 2158.85,1310 2163.85,1315 2250,1315 2302.09,1262.91 v4(2459.49,1262.91)
SD-D0: J2.P7 R9.2 U1.38 | length 2122.7
  Top Layer w10: J2.P7@570.08,1525 J2.P7 J2.P7@576.81,1526.14 ; v1(630,1685) v1(1700,1685) ; v1(1700,1015) 1702.09,1012.91 U1.38
  Layer 2 w10: v4(630,1525) v1(630,1685) ; v1(1700,1015) v1(1700,1685)
  Bottom Layer w10: v4(570,1525) v4(630,1525) 664.36,1490.64 682.55,1490.64 R9.2
SD-D1: J2.P8 R10.2 U1.4 | length 2773.3
  Top Layer w10: v4(568.94,1569.45) J2.P8@569.21,1569.72 ; v4@604.72,1569.72 v4(605,1570) ; v1(605,1710) 2285,1710 v1(2287.5,1707.5) ; v1(2285,1065) 2457.4,1065 U1.4
  Layer 2 w10: v4(605,1570) v1(605,1710) ; v1@2287.5,1067.5 v1(2285,1065) 2285,1702.29 2287.5,1704.79 v1(2287.5,1707.5)
  Bottom Layer w10: v4(568.94,1569.45) 604.45,1569.45 v4(605,1570) 605.55,1569.45 688.74,1569.45 R10.2
SD-D2: J2.P1 R11.2 U1.20 | length 2236.1
  Top Layer w10: v1(2135,1550) 2135,1587.17 2149.98,1602.15 U1.20
  Layer 2 w10: v2(600,1140) v2(600,1265) ; v2(2040,1135) 2040,1445.27 2135,1540.27 v1(2135,1550)
  Bottom Layer w10: v4(568.94,1266.3) 569.59,1265.65 599.35,1265.65 v2(600,1265) ; v2(600,1140) 602.71,1140 607.71,1135 v2(2040,1135) ; v2@600,1266.3 v2@605,1266.3 ; v2@605,1265 635,1235 R11.2
SD-D3: J2.P2 R12.2 U1.21 | length 2144.8
  Top Layer w10: v1(2090,1553.72) U1.21
  Layer 2 w10: v2(625,1165) v2(625,1310) ; v2(2015,1165) 2015,1478.72 v1(2090,1553.72)
  Bottom Layer w10: v4(568.94,1309.61) 569.13,1309.8 624.8,1309.8 v2(625,1310) ; v2(625,1165) v2(2015,1165) ; v2@625,1309.61 630,1309.61 630.39,1310 693.19,1310 R12.2
SD-EN: J2.DSW2 U1.5 | length 1702.4
  Top Layer w10: J2.DSW2 1062.64,1364.65 1072.99,1375 v4(1095,1375) ; v1(2310,1120) 2452.4,1120 U1.5
  Layer 2 w10: v1(2310,1120) v2(2310,1405)
  Bottom Layer w10: v4(1095,1375) 1125,1405 v2(2310,1405)
pads on no net: J1.4 U1.6 U1.7 U1.12 U1.16 U1.17 U1.18 U1.19 U1.26 U1.28 U1.29 U1.30 U2.1 U2.5 U2.9 U2.10 U2.11 U2.12 U2.13 U2.14 U2.15 U2.16 U2.17 U2.18 U2.22 U2.24

## Polygon pours and split planes (outlines as drawn)
GND on GND "GND_L03_P001" (solid, pour order 1): 510,510 2990,510 2990,1740 510,1740

## Silkscreen, mask and mechanical layers (free items; w line width, h text height)
Top Overlay:
  text "IO1" at 2555,1540.63 h60
  text "IO3" at 2870,1540.63 h60
  text "IO16" at 2535,1445.63 h60
  text "IO17" at 2870,1445.63 h60
  text "IO18" at 2535,1345.63 h60
  text "IO19" at 2870,1345.63 h60
  text "IO21" at 2870,1250.63 h60
  text "IO20" at 2535,1240.63 h60
  text "IO38" at 2535,1145.63 h60
  text "IO39" at 2870,1145.63 h60
  text "IO40" at 2535,1040.63 h60
  text "IO41" at 2870,1040.63 h60
  text "IO42" at 2535,945.63 h60
  text "IO47" at 2870,945.63 h60
  text "IO48" at 2535,845.63 h60
  text "EN" at 2870,840 h60
  text "TX" at 2555,745 h60
  text "RX" at 2870,745 h60
  text "5V" at 2560,645.63 h60
  text "GND" at 2870,645.63 h60
  text "JLCJLCJLCJLC" at 1760,535 h60
  text "Sean Duffie `22" at 2495,530.63 h60
Mechanical 1:
  the board outline again, w0.04

## Text inside footprints (layer, text, board x,y; h text height)
J1: Mechanical 13 "PCB END" at 517.44,579.06 h16 r270
U1: Mechanical 13 "ANTENNA" at 2292.17,745.98 h50 r180